# Allegro board Lock_NTHU-TEST_BOARD_V1-0911_view_locked.brd
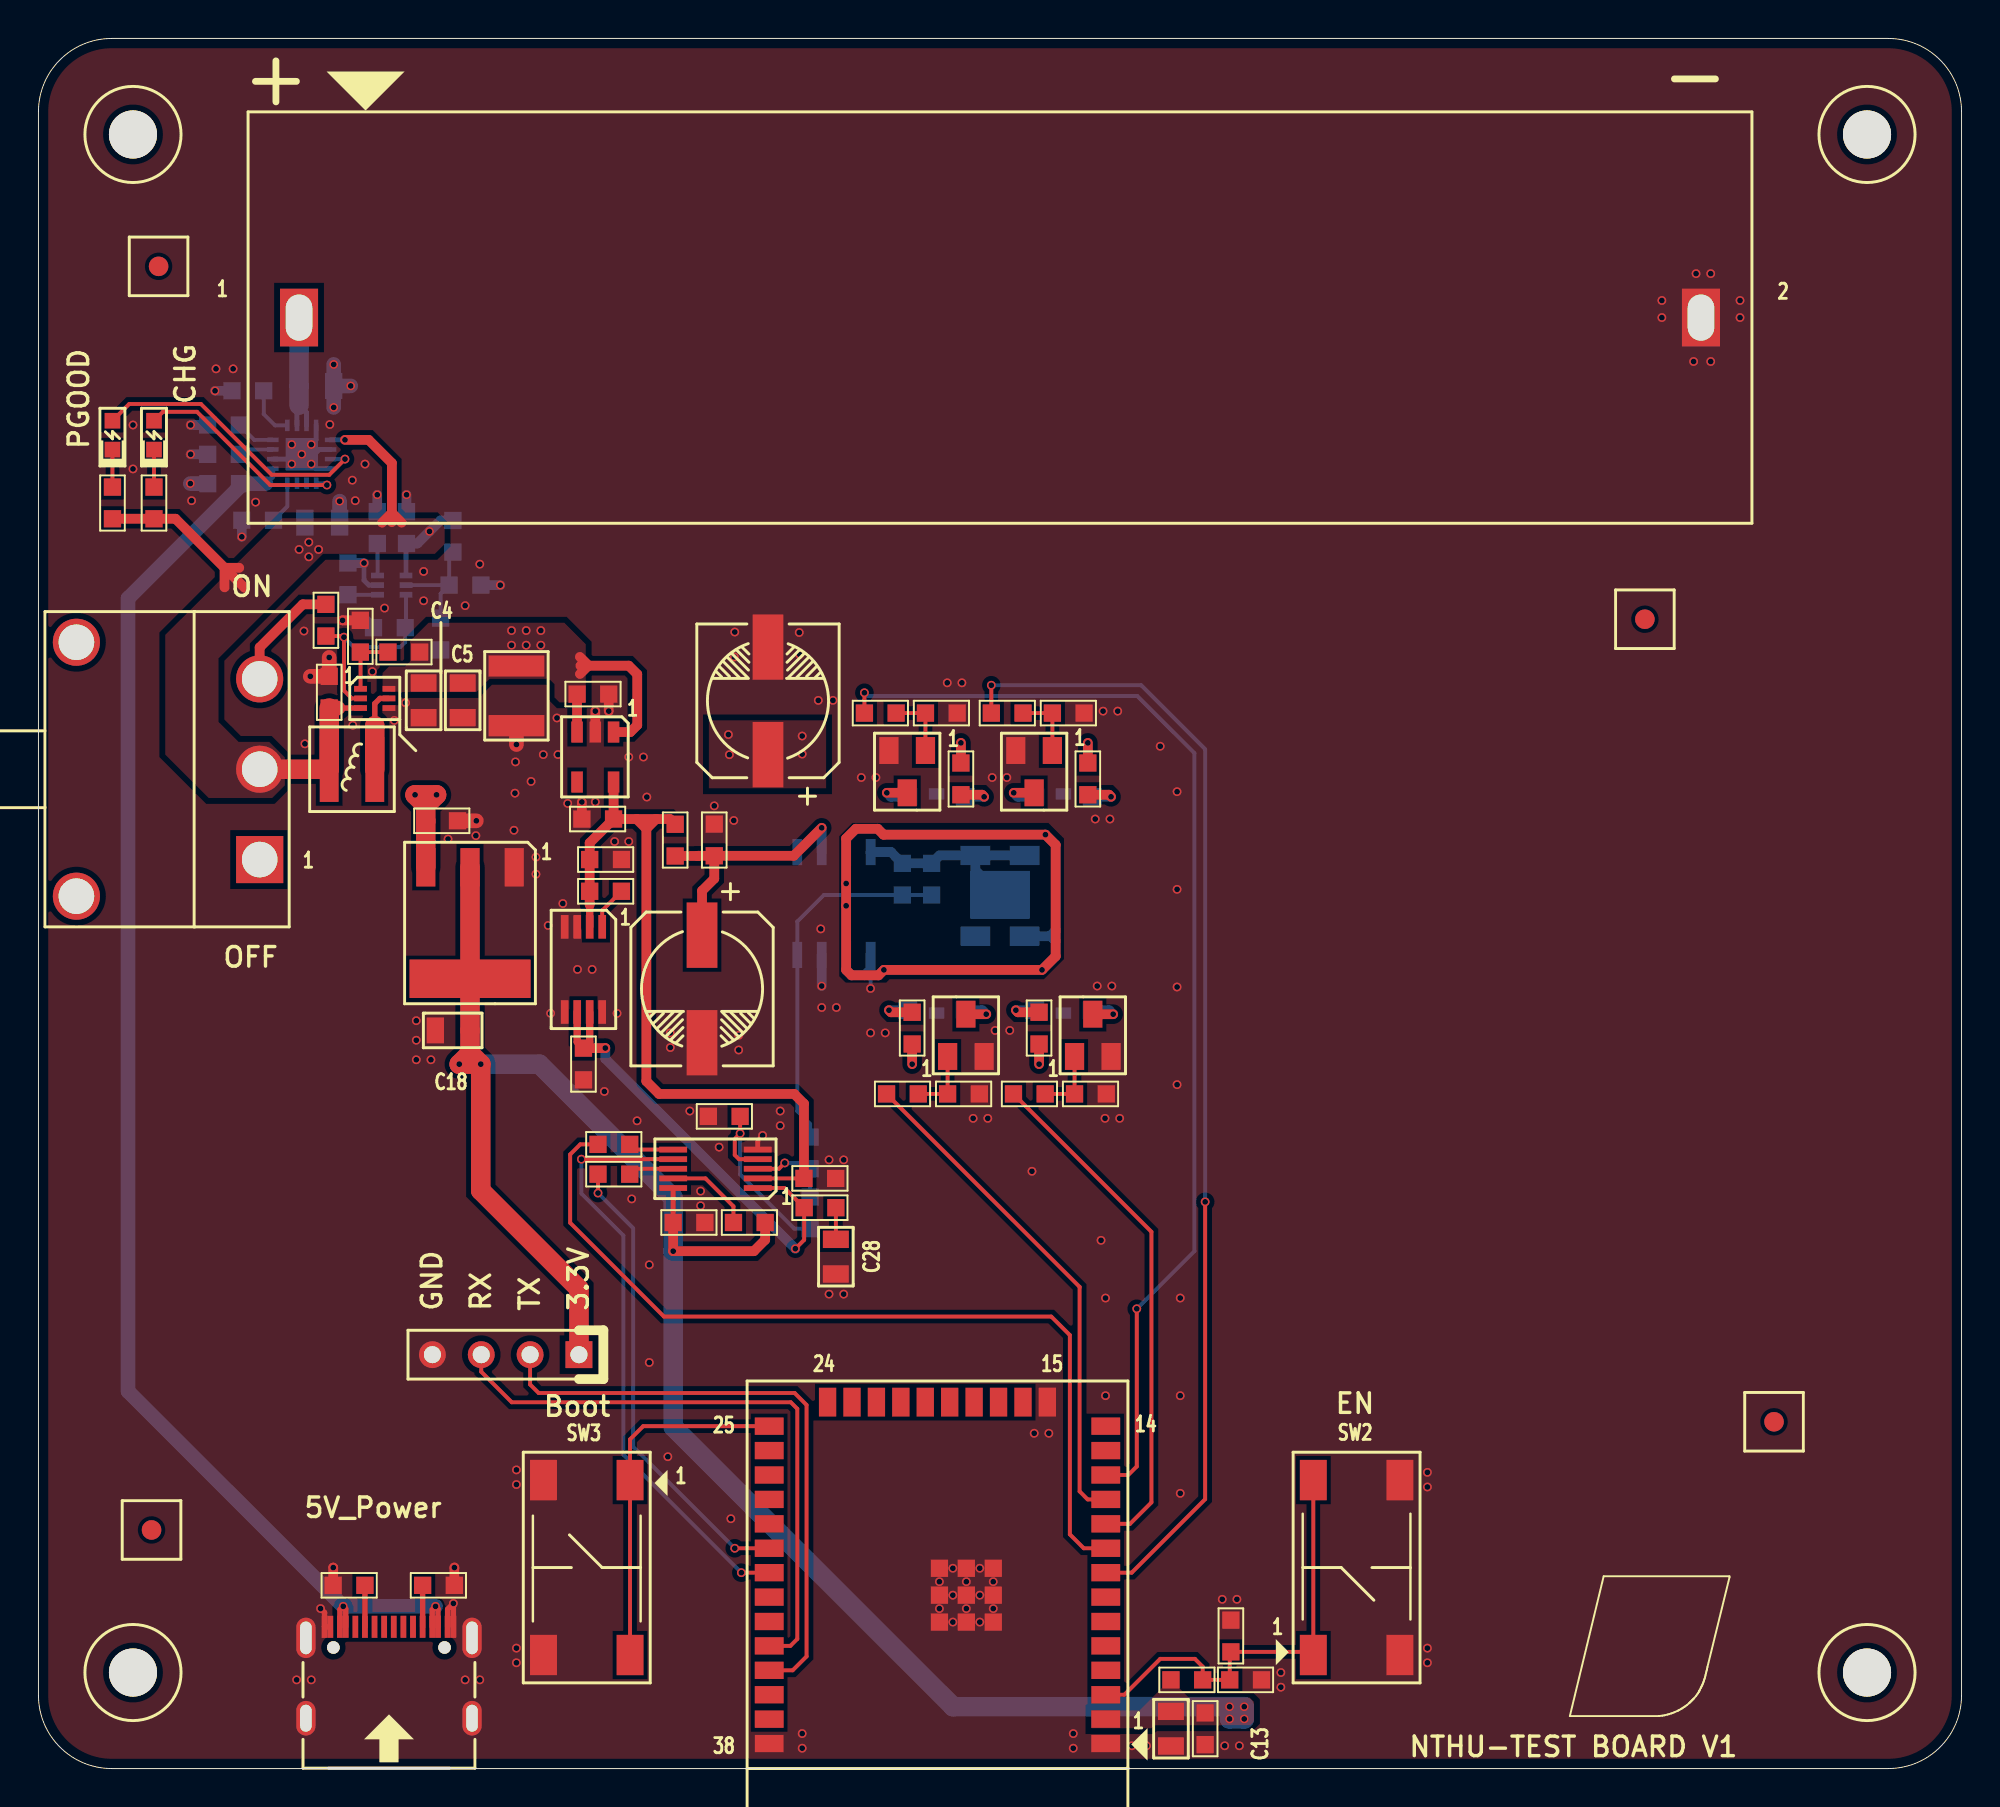
[diagram p0: board, top side]
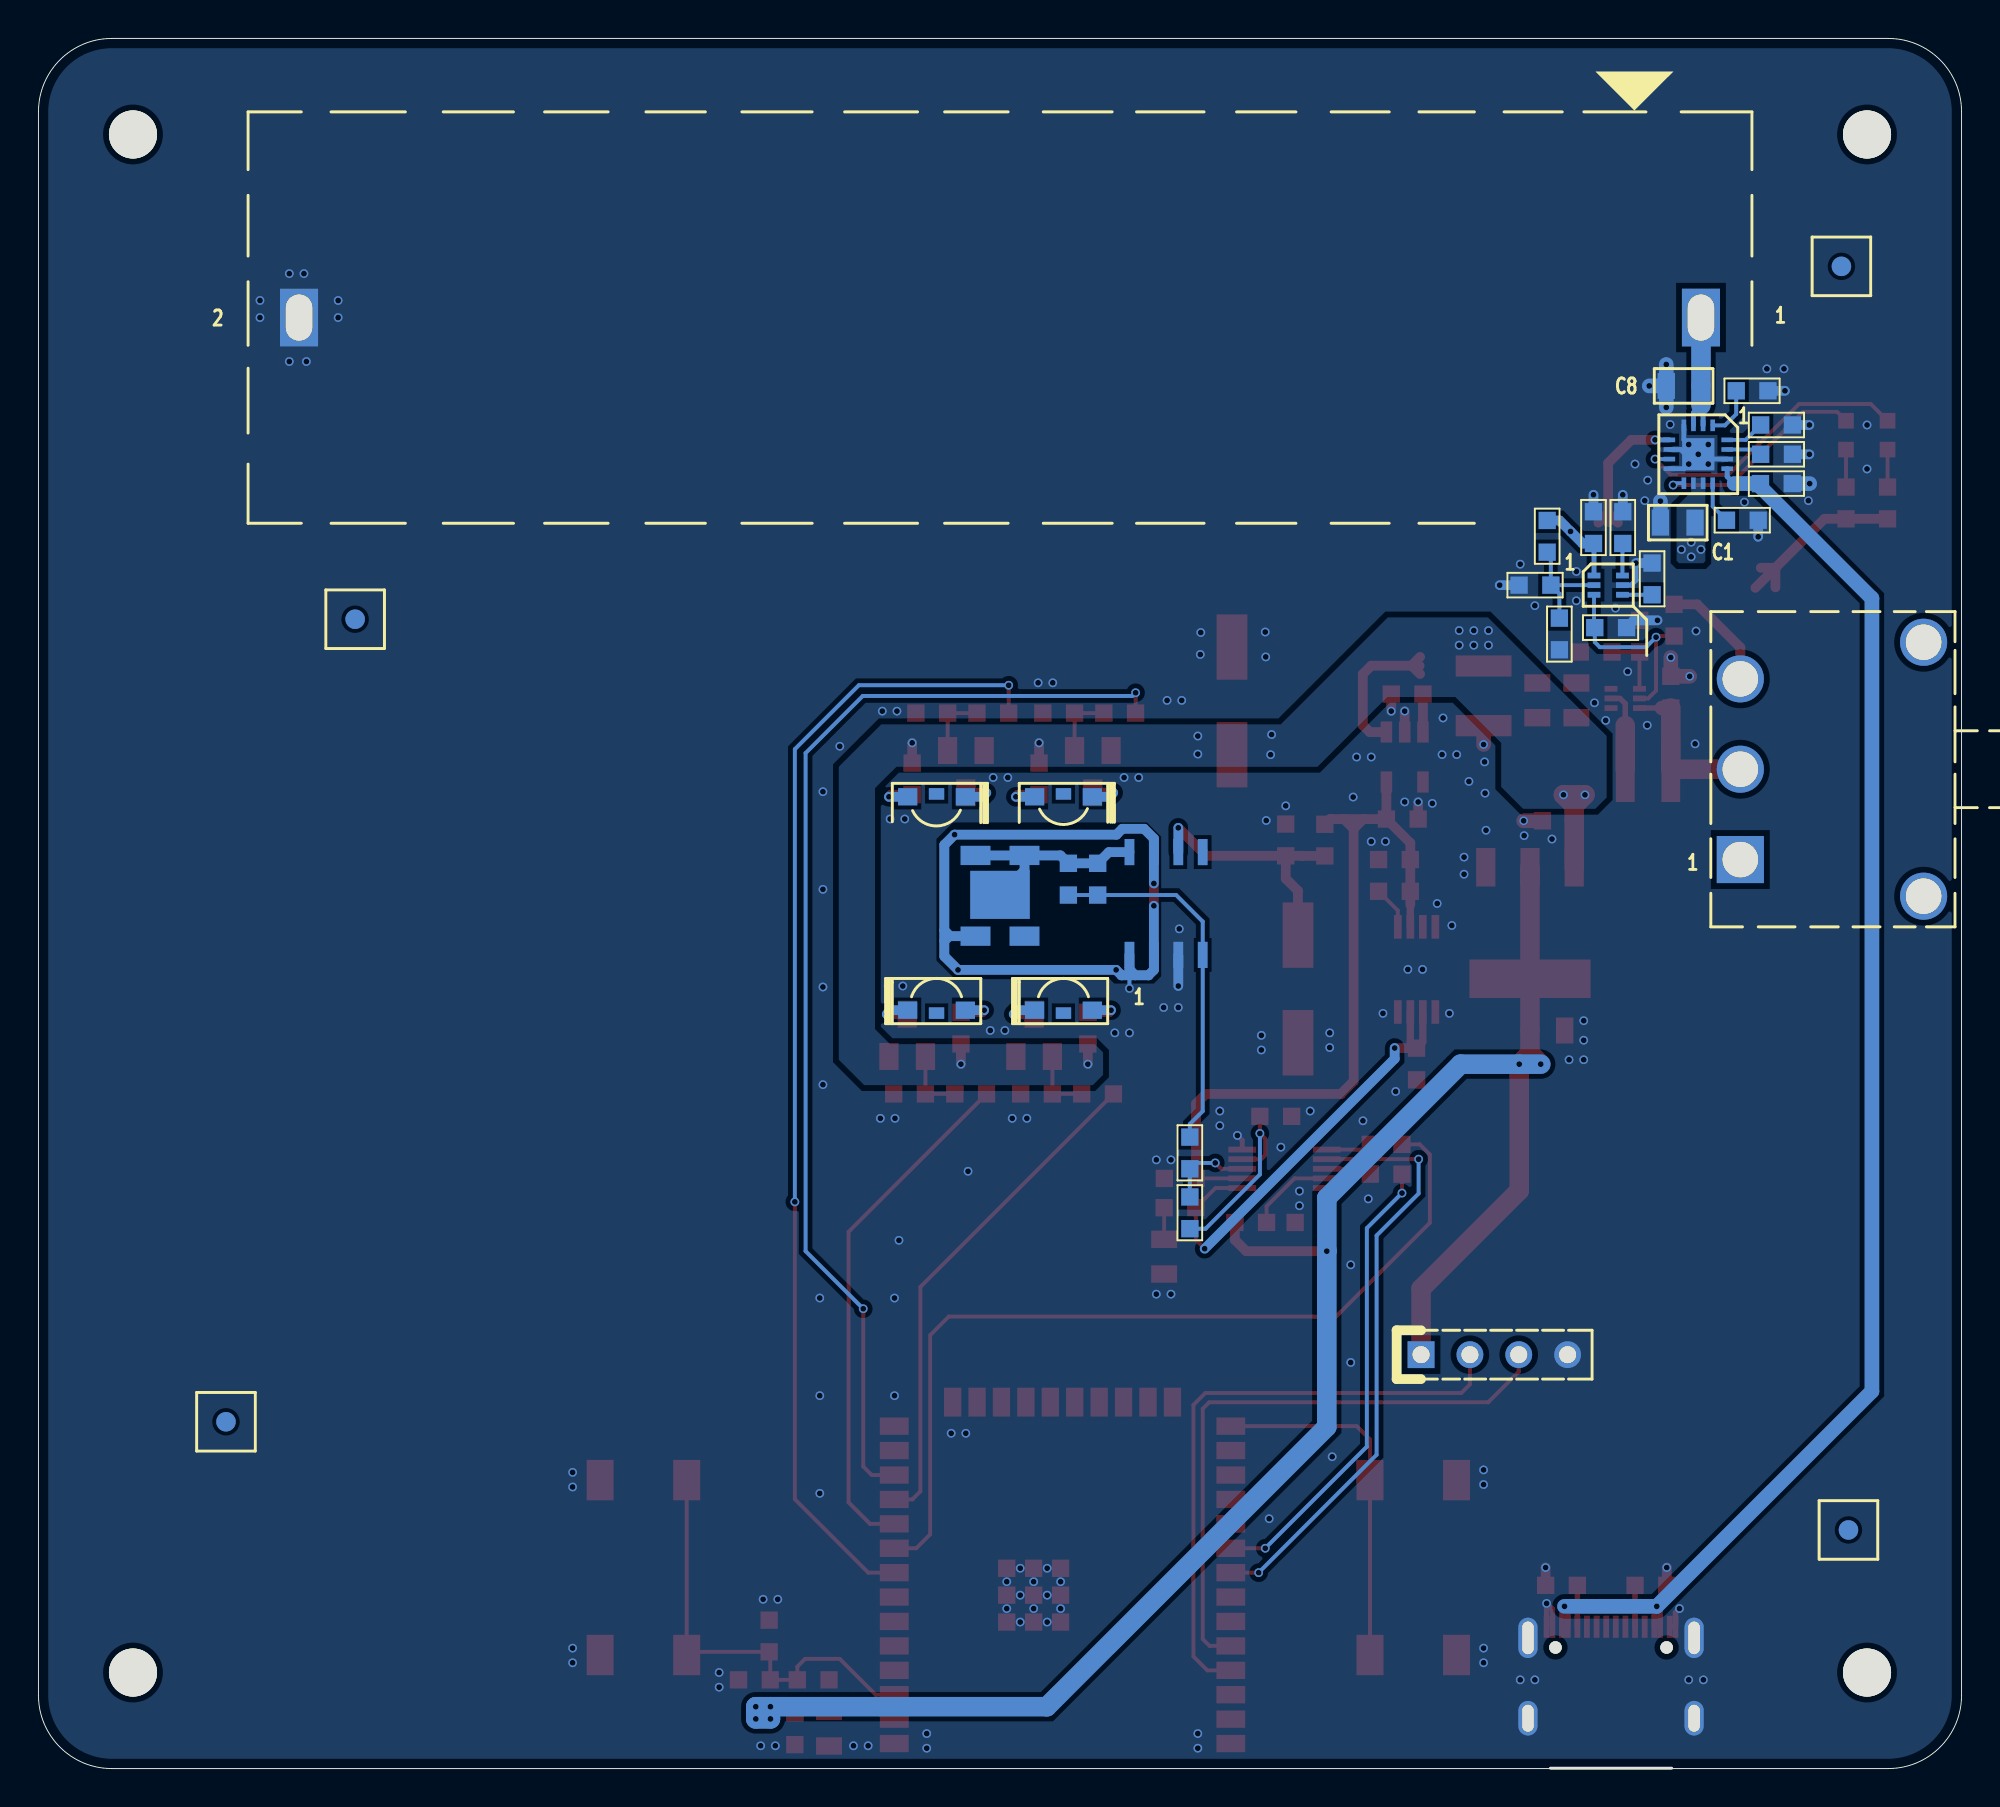
[diagram p1: board, bottom side, seen from below]

Outline 100 x 90 mm; copper layers: TOP, BOTTOM. Coordinates in mm from the lower left corner of the outline.
Outline path: 0,86.19 0,3.81 arc(1.12,1.12) 3.81,0 96.19,0 arc(98.88,1.12) 100,3.81 100,86.19 arc(98.88,88.88) 96.19,90 3.81,90 arc(1.12,88.88) 0,86.19

## Placement (name value [footprint] x y rotation side)
C1  4.7uF/25V/X7R,0805  [C0805]  14.76 64.81 180 bottom
C2  10uF/10V/X7R,0603  [C0603]  15.12 55.99 270 top
C3  47uF/10V/X7R,1210  [C1210]  24.85 55.8 270 top
C4  22uF/10V/X7R,0805  [C0805]  20.03 55.57 270 top
C5  22uF/10V/X7R,0805  [C0805]  22.06 55.57 270 top
C6  1uF/50V/X7R,0603  [C0603]  9.63 66.84 180 bottom
C7  0.1uF/50V/X7R,0603  [C0603]  19.14 64.55 90 bottom
C8  4.7uF/25V/X7R,0805  [C0805]  14.45 71.92 0 bottom
C9  1nF/50V/X7R,0603  [C0603]  20.91 59.02 270 bottom
C10  0.1uF/50V/X7R,0603  [C0603]  17.61 64.55 90 bottom
C11  10nF/50V/X7R,0603  [C0603]  16.09 61.89 90 bottom
C12  47uF/16V,EXV476M016A9GAA  [CASE_6P3X7P7]  37.93 55.54 180 top
C13  22uF/10V/X7R,0805  [C0805]  58.89 2.07 90 top
C14  0.1uF/50V/X7R,0603  [C0603]  60.67 2.07 90 top
C15  0.1uF/50V/X7R,0603  [C0603]  62.01 6.89 90 top
C16  10uF/10V/X7R,0603  [C0603]  62.77 4.61 180 top
C17  10uF/10V/X7R,0603  [C0603]  20.97 49.3 0 top
C18  22uF/10V/X7R,0805  [C0805]  21.54 38.4 180 top
C19  1uF/50V/X7R,0603  [C0603]  28.83 55.89 0 top
C20  1uF/50V/X7R,0603  [C0603]  29.08 49.39 180 top
C21  2.2pF/50V/NP0,0603  [C0603]  46.44 46.26 90 bottom
C22  0.1uF/50V/X7R,0603  [C0603]  29.49 47.29 0 top
C23  10uF/10V/X7R,0603  [C0603]  28.34 36.65 270 top
C24  1000pF/50V/NP0,0603  [C0603]  40.13 28.91 90 bottom
C25  0.1uF/50V/X7R,0603  [C0603]  35.14 48.31 270 top
C26  100uF/16V,UUL1C101MCL1GS  [CASE_6P3X7P7]  34.51 40.55 0 top
C27  1uF/50V/X7R,0603  [C0603]  33.83 28.41 180 top
C28  10uF/25V/X7R,0805  [C0805]  41.47 26.63 90 top
C29  1uF/50V/X7R,0603  [C0603]  40.63 30.7 0 top
D1  155124BS73200  [LED-21_1204-RA]  53.3 39.45 180 bottom
D2  155124BS73200  [LED-21_1204-RA]  46.7 39.45 180 bottom
D3  155124BS73200  [LED-21_1204-RA]  46.7 50.55 0 bottom
D4  155124BS73200  [LED-21_1204-RA]  53.3 50.55 0 bottom
D5  VEMD5060X01  [SENSOR-VEMD5060X01_4X5_4P_EP]  50 45.4 180 bottom
DPS1  Green LED  [LED_0603]  3.85 69.36 90 top
DPS2  Red LED  [LED_0603]  6.01 69.36 90 top
FD1  -  [FD_040]  6.25 78.14 0 top
FD2  -  [FD_040]  5.88 12.41 0 top
FD3  -  [FD_040]  90.25 18.04 0 top
FD4  -  [FD_040]  83.53 59.79 0 top
FD5  -  [FD_040]  6.25 78.14 180 bottom
FD6  -  [FD_040]  5.88 12.41 180 bottom
FD7  -  [FD_040]  90.25 18.04 180 bottom
FD8  -  [FD_040]  83.53 59.79 180 bottom
H1  CON  [PAD-D2P5MM]  4.91 85 0 top
H2  CON  [PAD-D2P5MM]  4.91 4.99 0 top
H3  CON  [PAD-D2P5MM]  95.08 4.99 0 top
H4  CON  [PAD-D2P5MM]  95.08 85 0 top
J1  Battery_Case  [BATTERY-CASE_77P7X20P9_2P_PIN3]  50 75.48 180 top
J2  USB TYPE C FEMALE  [USB_S041_B0A20]  18.23 0.02 0 top
J3  CON4  [CON-4P]  28.11 21.53 180 top
L1  XEL4030-102MEC  [L_4X4]  16.3 51.98 0 top
NOREF  -  []  0 86.19 0 top
NOREF#2  -  []  96.19 0 90 top
Q1  AO3400A  [SOT23_3P12X1P5_3P]  54.83 38.14 0 top
Q2  AO3400A  [SOT23_3P12X1P5_3P]  48.23 38.14 0 top
Q3  AO3400A  [SOT23_3P12X1P5_3P]  45.17 51.86 180 top
Q4  AO3400A  [SOT23_3P12X1P5_3P]  51.77 51.86 180 top
R1  4.12k,0603  [R0603]  9.62 68.37 0 bottom
R2  1.18k,0603  [R0603]  11.4 64.94 0 bottom
R3  1.13k,0603  [R0603]  9.62 69.89 0 bottom
R4  100k,0603  [R0603]  14.95 59.74 270 top
R5  1.5k,0603  [R0603]  3.85 65.84 270 top
R6  732k,0603  [R0603]  19 58.08 0 top
R7  1.5k,0603  [R0603]  6.01 65.84 270 top
R8  100k,0603  [R0603]  16.74 58.9 270 top
R9  10k,0603  [R0603]  10.89 71.67 0 bottom
R10  374k,0603  [R0603]  21.55 64.1 90 bottom
R11  470k,0603  [R0603]  18.24 59.35 0 bottom
R12  100k,0603  [R0603]  22.18 61.56 180 bottom
R13  5.1k,0603  [R0603]  16.15 9.53 0 top
R14  5.1k,0603  [R0603]  20.8 9.53 180 top
R15  10k,0603  [R0603]  59.71 4.61 0 top
R16  100R,0603  [R0603]  52.03 38.52 90 top
R17  220R,0603  [R0603]  51.53 35.09 0 top
R20  100k,0603  [R0603]  54.7 35.09 0 top
R21  100R,0603  [R0603]  45.43 38.52 90 top
R22  220R,0603  [R0603]  44.93 35.09 0 top
R23  100k,0603  [R0603]  48.1 35.09 0 top
R24  100R,0603  [R0603]  47.97 51.48 270 top
R25  220R,0603  [R0603]  43.77 54.91 0 top
R26  100k,0603  [R0603]  46.95 54.91 0 top
R27  100M,0603  [R0603]  44.92 46.26 90 bottom
R28  10k,0603  [R0603]  29.49 45.63 0 top
R29  100R,0603  [R0603]  40.13 32.02 90 bottom
R30  100R,0603  [R0603]  54.57 51.48 270 top
R31  100R,0603  [R0603]  33.11 48.3 90 top
R32  220R,0603  [R0603]  50.37 54.91 0 top
R33  100k,0603  [R0603]  53.55 54.91 0 top
R34  0.1R,0603  [R0603]  40.64 29.18 180 top
R35  10k,0603  [R0603]  36.96 28.41 0 top
R36  100R,0603  [R0603]  35.66 33.93 0 top
R37  47R,0603  [R0603]  29.92 30.92 180 top
R38  47R,0603  [R0603]  29.92 32.47 180 top
SW1  Slide_Switch  [SW_500-M6-SPDT_3P_4P7_PIN2P8]  6.74 51.98 270 top
SW2  Tactile_Switch  [SW_FSM4JSMAATR_4P]  68.54 10.46 180 top
SW3  Tactile_Switch  [SW_FSM4JSMAATR_4P]  28.51 10.46 0 top
U1  TPS61023  [IC_SOT23_1P3X1P7_6P_0P5MM]  17.49 55.67 0 top
U2  BQ24074  [IC_VQFN_3X3_16P_0P5MM_EP]  13.69 68.37 270 bottom
U3  TPS3842A010DRLR  [IC_SOT23_1P3X1P7_6P_0P5MM]  18.37 61.56 180 bottom
U4  ESP32-WROOM-32E  [MODULE_ESP32-WROOM-32E_38P_EP]  46.75 6.56 180 top
U5  EC50117KBG  [SOT223-4P-2P3MM-7X6P5MM]  22.44 43.98 180 top
U6  LP5907MFX-3.3/NOPB  [IC_SOT23_3P05X1P75_5P_0P95MM]  28.96 52.62 270 top
U7  LTC6655BHMS8-2.5#PBF  [IC_MSOP_3X3_8P_0P65MM]  28.34 41.57 180 top
U8  LMP7721  [IC_SOIC_3P99X5P05_8P_1P27MM]  41.36 45 90 bottom
U9  ADS8866IDGS  [IC_VSSOP_3X3_10P_0P5MM]  35.2 31.2 180 top

## Library data of the parts
C1-C11 C13-C25 C27-C29 = C0.01uF
C12 C26 = 100uF-16V-T-D
D1-D4 DPS1 DPS2 = LED_0
D5 = VEMD5060X01
FD1-FD8 = FD_040
H1-H4 = PH 2_9.54mm 1x3 180degree DIP
J1 = CON2
J2 = H20PIN_59
J3 = CON4
L1 = INDUCTOR
Q1-Q4 = RTR025N03HZGTL_N-type
R1-R17 R20-R38 = R10
SW1 = Slide_Switch
SW2 SW3 = Tactile_Switch
U1 = TPS61023
U2 = BQ24074
U3 = TPS3842A010DRLR
U4 = ESP32-WROOM-32E
U5 = H20PIN_9
U6 = LP5907MFX-3.3/NOPB
U7 = LTC6655BHMS8-2.5#PBF
U8 = LMP7721
U9 = ADS8866IDGS

## Footprints (pads in the part's own frame, mm; a bottom-side part is the same pattern mirrored in y, then rotated)
BATTERY-CASE_77P7X20P9_2P_PIN3
  rect 1.98x3 hole 1.38x2.4: 1(36.45,0) 2(-36.45,0)
C0603
  rect 0.9x0.9 smd: 1(-0.825,0) 2(0.825,0)
C0805
  rect 0.904x1.35 smd: 1(-0.902,0) 2(0.902,0)
C1210
  rect 1.104x2.9 smd: 1(-1.552,0) 2(1.552,0)
CASE_6P3X7P7
  rect 1.6x3.4 smd: 1(0,2.8) 2(0,-2.8)
CON-4P
  rect 1.397x1.397 hole 0.889: 1(0,0)
  round 1.397 hole 0.889: 2(2.54,0) 3(5.08,0) 4(7.62,0)
FD_040
  round 1.016 smd: 1(0,0)
IC_MSOP_3X3_8P_0P65MM
  rect 0.4x1.229 smd: 1(-0.975,-2.214) 2(-0.325,-2.214) 3(0.325,-2.214) 4(0.975,-2.214) 5(0.975,2.214) 6(0.325,2.214) 7(-0.325,2.214) 8(-0.975,2.214)
IC_SOIC_3P99X5P05_8P_1P27MM
  rect 1.359x0.51 smd: 1(-2.674,1.905) 2(-2.674,0.635) 3(-2.674,-0.635) 4(-2.674,-1.905) 5(2.674,-1.905) 6(2.674,-0.635) 7(2.674,0.635) 8(2.674,1.905)
IC_SOT23_1P3X1P7_6P_0P5MM
  rect 0.67x0.3 smd: 1(-0.74,0.5) 2(-0.74,0) 3(-0.74,-0.5) 4(0.74,-0.5) 5(0.74,0) 6(0.74,0.5)
IC_SOT23_3P05X1P75_5P_0P95MM
  rect 1.1x0.6 smd: 1(-1.3,0.95) 2(-1.3,0) 3(-1.3,-0.95) 4(1.3,-0.95) 5(1.3,0.95)
IC_VQFN_3X3_16P_0P5MM_EP
  rect 0.6x0.24 smd: 1(-1.504,0.75) 2(-1.504,0.25) 3(-1.504,-0.25) 4(-1.504,-0.75) 9(1.504,-0.75) 10(1.504,-0.25) 11(1.504,0.25) 12(1.504,0.75)
  rect 0.24x0.6 smd: 5(-0.75,-1.504) 6(-0.25,-1.504) 7(0.25,-1.504) 8(0.75,-1.504) 13(0.75,1.504) 14(0.25,1.504) 15(-0.25,1.504) 16(-0.75,1.504)
  rect 1.68x1.68 smd: EP(0,0)
IC_VSSOP_3X3_10P_0P5MM
  rect 1.45x0.3 smd: 1(-2.2,1) 2(-2.2,0.5) 3(-2.2,0) 4(-2.2,-0.5) 5(-2.2,-1) 6(2.2,-1) 7(2.2,-0.5) 8(2.2,0) 9(2.2,0.5) 10(2.2,1)
L_4X4
  rect 0.98x3.4 smd: 1(-1.185,0) 2(1.185,0)
LED-21_1204-RA
  rect 0.8x0.6 smd: (0,-0.15)
  rect 1x0.9 smd: 1(-1.5,0) 2(1.5,0)
LED_0603
  rect 0.813x0.813 smd: 1(0.75,0) 2(-0.75,0)
MODULE_ESP32-WROOM-32E_38P_EP
  rect 1.5x0.9 smd: 1(-8.75,5.26) 2(-8.75,3.99) 3(-8.75,2.72) 4(-8.75,1.45) 5(-8.75,0.18) 6(-8.75,-1.09) 7(-8.75,-2.36) 8(-8.75,-3.63) 9(-8.75,-4.9) 10(-8.75,-6.17) 11(-8.75,-7.44) 12(-8.75,-8.71) 13(-8.75,-9.98) 14(-8.75,-11.25) 25(8.75,-11.25) 26(8.75,-9.98) 27(8.75,-8.71) 28(8.75,-7.44) 29(8.75,-6.17) 30(8.75,-4.9) 31(8.75,-3.63) 32(8.75,-2.36) 33(8.75,-1.09) 34(8.75,0.18) 35(8.75,1.45) 36(8.75,2.72) 37(8.75,3.99) 38(8.75,5.26)
  rect 0.9x1.5 smd: 15(-5.715,-12.5) 16(-4.445,-12.5) 17(-3.175,-12.5) 18(-1.905,-12.5) 19(-0.635,-12.5) 20(0.635,-12.5) 21(1.905,-12.5) 22(3.175,-12.5) 23(4.445,-12.5) 24(5.715,-12.5)
  rect 0.9x0.9 smd: EP1(-2.9,-1.06) EP2(-2.9,-2.46) EP3(-2.9,-3.86) EP4(-1.5,-1.06) EP5(-1.5,-2.46) EP6(-1.5,-3.86) EP7(-0.1,-1.06) EP8(-0.1,-2.46) EP9(-0.1,-3.86)
PAD-D2P5MM
  round 2.5 hole 2.5 unplated: (0,0)
R0603
  rect 0.9x0.9 smd: 1(-0.825,0) 2(0.825,0)
SENSOR-VEMD5060X01_4X5_4P_EP
  rect 1.55x1 smd: 1(1.275,2.1) 2(-1.275,2.1) 3(-1.275,-2.1) 4(1.275,-2.1)
  rect 3.1x2.5 smd: EP(0,0.05)
SOT23_3P12X1P5_3P
  rect 1x1.4 smd: 1(-0.95,-1.1) 2(0.95,-1.1) 3(0,1.1)
SOT223-4P-2P3MM-7X6P5MM
  rect 1x2 smd: 1(-2.3,-2.9) 2(0,-2.9) 3(2.3,-2.9)
  rect 6.3x2 smd: 4(0,2.9)
SW_500-M6-SPDT_3P_4P7_PIN2P8
  round 2.45 hole 1.85: (-6.605,-4.765) (6.605,-4.765) 2(0,4.765) 3(-4.7,4.765)
  rect 2.45x2.45 hole 1.85: 1(4.7,4.765)
SW_FSM4JSMAATR_4P
  rect 1.4x2.1 smd: 1(2.25,4.55) 2(2.25,-4.55) 3(-2.25,4.55) 4(-2.25,-4.55)
USB_S041_B0A20
  round 0.65 hole 0.65 unplated: (-2.89,6.28) (2.89,6.28)
  rect 0.3x1.15 smd: A1(-3.35,7.355) A4(-2.55,7.355) A5(-1.25,7.355) A6(-0.25,7.355) A7(0.25,7.355) A8(1.25,7.355) A9(2.55,7.355) A12(3.35,7.355) B1(3.05,7.355) B4(2.25,7.355) B5(1.75,7.355) B6(0.75,7.355) B7(-0.75,7.355) B8(-1.75,7.355) B9(-2.25,7.355) B12(-3.05,7.355)
  oval 1x2.1 hole 0.6x1.7: C1(-4.32,6.78) C2(4.32,6.78)
  oval 1x1.8 hole 0.6x1.4: C3(4.32,2.6) C4(-4.32,2.6)

## Nets
3V3_ANA: C20.1 C22.1 C29.1 R28.1 R31.2 U6.5(OUT) U7.2(VIN) U9.2(AVDD)
3V3_DIG: C13.2 C14.2 C18.1 C27.2 J3.1 R15.1 R35.2 U4.2(3V3) U5.2(OUTPUT_1) U5.4(OUTPUT_2) U9.10(DVDD)
5V: C3.1 C4.1 C5.1 C12.1 C17.1 C19.1 R6.2 R16.1 R21.1 R24.1 R30.1 U1.6(VOUT) U5.3(INPUT) U6.1(IN) U6.3(EN)
5V_USB: C6.1 J2.A4(VBUS1) J2.A9(VBUS4) J2.B4(VBUS3) J2.B9(VBUS2) U2.13(IN)
GND: C1.1 C2.1 C3.2 C4.2 C5.2 C6.2 C7.2 C8.2 C9.2 C10.2 C11.2 C12.2 C13.1 C14.1 C15.2 C16.1 C17.2 C18.2 C19.2 C20.2 C22.2 C23.2 C25.1 C26.2 C27.1 C28.1 C29.2 D5.3(ANODE) J1.2 J2.A1(GND1) J2.A12(GND4) J2.B1(GND3) J2.B12(GND2) J2.C1(GND5) J2.C2(GND6) J2.C3(GND7) J2.C4(GND8) J3.4 Q1.2(S) Q2.2(S) Q3.2(S) Q4.2(S) R1.1 R2.1 R3.1 R8.1 R9.1 R11.1 R12.1 R13.1 R14.1 R20.2 R23.2 R26.2 R33.2 R36.1 SW2.3(B_1) SW2.4(B_2) SW3.3(B_1) SW3.4(B_2) U1.4(GND) U2.4(C\E\) U2.6(EN1) U2.8(VSS) U2.14(TMR) U2.EP U3.5(GND) U4.1(GND[1]) U4.15(GND[2]) U4.38(GND[3]) U4.EP1 U4.EP2 U4.EP3 U4.EP4 U4.EP5 U4.EP6 U4.EP7 U4.EP8 U4.EP9 U5.1(ADJ/GND) U6.2(GND) U7.3(GND_1) U7.4(GND_2) U7.5(GND_3) U7.8(GND_4) U8.1(IN+) U8.2(NC_1) U8.3(V-) U8.7(NC_3) U9.5(GND)
ADC_AINN: C24.1 R36.2 U9.4(AINN)
ADC_AINP: C24.2 R29.1 U9.3(AINP)
ADC_CONVST: R38.2 U4.9(IO33)
ADC_DOUT: U4.31(IO19) U9.7(DOUT)
ADC_SCLK: R37.2 U4.30(IO18)
ESP_EN: C15.1 C16.2 R15.2 SW2.1(A_1) SW2.2(A_2) U4.3(EN)
ESP_IO0: SW3.1(A_1) SW3.2(A_2) U4.25(IO0)
LED1_GATE: R17.1 U4.10(IO25)
LED2_GATE: R22.1 U4.11(IO26)
LED3_GATE: R25.1 U4.12(IO27)
LED4_GATE: R32.1 U4.8(IO32)
PD_SUM: C21.2 D5.1(CATHODE_1) D5.2(CATHODE_2) D5.EP R27.2 U8.8(IN-)
VREF_2V5: C23.1 R34.2 U7.6(VOUT_S) U7.7(VOUT_F) U9.1(REF)
N149079: C1.2 C2.2 C7.1 L1.1 R5.2 R7.2 R10.2 SW1.2(COMM) U1.3(VIN) U2.5(EN2) U2.10(OUT_1) U2.11(OUT_2) U3.1(VDD)
N149165: DPS1.1(CATHODE) U2.7(P\G\O\O\D\)
N149169: DPS2.1(CATHODE) U2.9(C\H\G\)
N149175: DPS1.2(ANODE) R5.1
N438766: DPS2.2(ANODE) R7.1
N2937937: C8.1 J1.1 U2.2(BAT_1) U2.3(BAT_2)
N2939517: C9.1 R10.1 R12.2 U3.2(SENSE)
N2940151: J2.A5(CC1) R13.2
N2940189: J2.B5(CC2) R14.2
N2942040: R3.2 U2.16(ISET)
N2942044: R2.2 U2.12(ILIM)
N2942048: R1.2 U2.15(ITERM)
N2942580: R9.2 U2.1(TS)
N2943997: R4.1 SW1.3(B)
N2944001: R4.2 R11.2 U1.2(EN) U3.3(R\E\S\E\T\)
N2944526: C11.1 U3.4(CTS)
N2944533: C10.1 U3.6(CTR)
N5094984: L1.2 U1.5(SW)
N5095522: R6.1 R8.2 U1.1(FB)
N5097864: D1.2(ANODE) R16.2
N5097868: D1.1(CATHODE) Q1.3(D)
N5097918: Q1.1(G) R17.2 R20.1
N5098229: D2.2(ANODE) R21.2
N5098233: D2.1(CATHODE) Q2.3(D)
N5098295: Q2.1(G) R22.2 R23.1
N5098941: D3.2(ANODE) R24.2
N5098945: D3.1(CATHODE) Q3.3(D)
N5099007: Q3.1(G) R25.2 R26.1
N5099099: D4.2(ANODE) R30.2
N5099103: D4.1(CATHODE) Q4.3(D)
N5099165: Q4.1(G) R32.2 R33.1
N5100922: R28.2 U7.1(S\H\D\N\)
N5106576: J3.2 U4.35(TXD0)
N5106619: J3.3 U4.34(RXD0)
N5113279: R35.1 U9.9(DIN)
N5114022: C21.1 R27.1 R29.2 U8.4(VOUT)
N5117523: C25.2 C26.1 R31.1 U8.6(V+)
N5126182: C28.2 R34.1
N5174510: R37.1 U9.8(SCLK)
N5174536: R38.1 U9.6(CONVST)

Pads without a net: D5 4; FD1 1; FD2 1; FD3 1; FD4 1; FD5 1; FD6 1; FD7 1; FD8 1; J2 A6 A7 A8 B6 B7 B8; SW1 1; U4 4 5 6 7 13 14 16 17 18 19 20 21 22 23 24 26 27 28 29 32 33 36 37; U6 4; U8 5

## Via types
v1: diameter 0.457, hole 0.305, TOP to BOTTOM, 252 vias

## Routing (per net, layer and track width the routed paths; a pad name or vN(x,y) marks a point on that pad's centre or on a via; arc(x,y) is an arc through that point)
3V3_ANA: length 40.9
  TOP w0.203: U9.2 C29.1
  TOP w0.381: U7.2 28.66,44.93
  TOP w0.508: C29.1 39.81,34.59 39.3,35.09 32.27,35.09 31.61,35.75 31.61,48.89 ; 31.61,48.89 32.12,49.39 ; 31.61,48.89 31.1,49.39 ; R31.2 32.84,49.39 32.12,49.39 ; 28.66,44.93 R28.1 C22.1 28.66,48.15 C20.1 ; C20.1 31.1,49.39 ; C20.1 U6.5 ; 31.1,49.39 32.12,49.39
3V3_DIG: length 102.5
  TOP w0.254: U9.10 C27.2
  TOP w0.508: R35.2 37.79,27.51 37.2,26.92 v1(33.01,26.92) 33,26.92 C27.2
  TOP w1.016: v1(23,36.64) 23,30.06 28.11,24.96 J3.1 ; v1(23,36.64) v1(21.88,36.64) 22.44,37.2 ; v1(23,36.64) 22.44,37.2 ; U5.2 U5.4 C18.1 22.44,37.2
  BOTTOM w1.016: v1(61.94,3.22) v1(61.94,2.58) v1(62.7,2.58) v1(62.7,3.22) v1(61.94,3.22) ; v1(61.94,3.22) 47.56,3.22 33.01,17.77 v1(33.01,26.92) 33,26.92 33,29.69 26.05,36.64 v1(23,36.64) v1(21.88,36.64)
5V: length 20.5
  TOP w0.508: R21.1 v1(45.43,36.64) ; 28.18,57.37 28.59,57.37 ; 28.59,57.37 28.61,57.37 ; 28.59,57.37 28.16,56.94 ; R30.1 v1(54.57,53.36) ; 28.61,57.37 28.16,57.83 ; 28.61,57.37 30.7,57.37 31.14,56.93 31.14,54.28 30.78,53.92 U6.1 ; C19.1 U6.3 ; R16.1 v1(52.03,36.64) ; R24.1 v1(47.97,53.36)
  TOP w1.016: U5.3 C17.1 20.14,50.09 ; 20.14,50.09 v1(19.58,50.65) v1(20.7,50.65) 20.14,50.09
  vias: v1(24.6,59.2) v1(24.6,58.44) v1(25.36,59.2) v1(25.36,58.44) v1(26.12,59.2) v1(26.12,58.44) v1(35.88,53.79) v1(35.93,52.74) v1(39.71,53.71) v1(39.71,52.77)
5V_USB: length 77
  TOP w0.279: J2.A4 15.68,8.27 v1(15.85,8.44) 15.98,8.31 J2.B9 ; J2.A9 20.78,8.31 v1(20.65,8.44) 20.48,8.27 J2.B4
  BOTTOM w0.254: 11.82,66.84 12.19,67.21 U2.13
  BOTTOM w0.762: v1(20.65,8.44) v1(15.85,8.44) 4.66,19.63 4.66,60.87 10.46,66.67 C6.1 11.82,66.84
GND: length 110.7
  TOP w0.254: U9.5 37.4,32.68 v1(37.66,32.93)
  TOP w0.279: J2.A12 v1(21.58,8.59) 21.28,8.29 J2.B1 ; J2.B12 J2.A1 14.88,8.11 v1(14.67,8.32)
  TOP w0.508: R8.1 15.81,59.73 v1(15.81,59.73) ; C19.2 v1(29.66,55.01) ; v1(21.63,10.46) 21.63,10.45 R14.1 ; R13.1 15.33,10.45 v1(15.33,10.46) ; U6.2 v1(28.96,55.01) ; C20.2 v1(28.26,50.28) ; 43.94,48.58 43.64,48.89 42.51,48.89 42,48.38 v1(42,46.04) v1(42,44.88) 42,41.55 42.28,41.26 43.68,41.26 v1(43.96,41.55) v1(52.18,41.55) 52.9,42.26 52.9,48.05 v1(52.36,48.58) 43.94,48.58
  TOP w0.762: C17.2 v1(22.77,49.3) ; C3.2 v1(24.85,53.27) ; v1(14.14,56.82) C2.1 v1(15.12,57.8)
  BOTTOM w0.203: 43.27,41.57 v1(43.27,40.58)
  BOTTOM w0.254: U2.14 12.91,68.12 v1(13.17,67.86) ; U2.6 14.61,68.62 14.36,68.37 v1(13.69,68.37) ; v1(16.93,62.71) 16.93,61.81 17.18,61.56 U3.5 ; U2.4 14.44,69.13 v1(14.19,68.88) ; U2.8 14.43,67.62 v1(14.19,67.86)
  BOTTOM w0.508: C7.2 v1(19.14,66.26) ; R12.1 v1(24.02,61.56) ; 40.73,42.33 v1(40.73,40.71) ; R3.1 v1(7.91,69.89) ; 52.9,43.04 52.9,43.6 ; 52.9,43.04 52.9,42.26 v1(52.18,41.55) v1(43.96,41.55) 43.68,41.26 43.68,41.27 42.96,41.27 ; 52.9,43.04 52.64,43.3 52.59,43.3 ; 52.9,43.6 52.9,48.05 v1(52.36,48.58) 43.94,48.58 43.64,48.89 42.51,48.89 42,48.38 U8.7 v1(42,46.04) ; 52.9,43.6 52.59,43.3 ; 43.27,42.33 43.27,41.57 42.96,41.27 ; 42.96,41.27 42.28,41.27 42,41.55 U8.2 v1(42,44.88) ; R9.1 v1(9.18,71.67) ; D5.3 52.59,43.3 ; C11.2 v1(16.93,62.71) ; v1(15.81,59.73) 17.04,59.73 R11.1 ; R1.1 v1(7.91,68.37) ; C10.2 v1(17.61,66.26) ; R2.1 v1(10.57,64.08)
  BOTTOM w0.762: C1.1 v1(15.66,65.93) ; C8.2 v1(15.35,70.81) ; C8.2 v1(15.35,73.04) ; C8.2 v1(16.24,71.92) ; C6.2 v1(7.9,66.84)
  vias: v1(4.91,69.89) v1(4.91,67.61) v1(7.96,65.95) v1(9.23,72.81) v1(10.12,72.81) v1(11.29,65.88) v1(13.17,68.88) v1(13.42,4.61) v1(13.8,59.17) v1(13.86,53.31) v1(14.19,4.61) v1(15.15,69.92) v1(16.32,67.02) v1(16.34,54.27) v1(16.47,65.95) v1(16.98,67.86) v1(17.36,57.06) v1(18,60.37) v1(18.5,54.52) v1(19.09,55.44) v1(19.65,38.9) v1(19.65,37.89) v1(19.65,36.87) v1(20.03,62.27) v1(20.03,60.75) v1(20.41,36.87) v1(21.3,48.35) v1(22.19,60.49) v1(22.19,4.61) v1(22.75,48.53) v1(22.95,62.65) v1(22.95,4.61) v1(24.73,48.81) v1(24.8,52.37) v1(24.78,50.74) v1(24.85,15.54) v1(24.85,14.77) v1(24.85,6.26) v1(24.85,5.5) v1(25.62,51.35) v1(25.87,47.41) v1(25.87,46.52) v1(26.25,52.75) v1(26.5,43.86) v1(26.63,39.28) v1(26.96,54.65) v1(27.01,52.75) v1(27.27,45) v1(27.52,50.21) v1(28.03,41.57) v1(28.79,41.57) v1(28.96,50.28) v1(29.43,35.22) v1(29.96,48.23) v1(30.09,39.28) v1(30.7,52.62) v1(30.7,48.23) v1(30.85,29.63) v1(31.13,33.7) v1(31.46,52.62) v1(31.64,50.54) v1(31.76,26.2) v1(31.76,21.12) v1(32.73,16.22) v1(32.85,38.27) v1(32.85,37.51) v1(33.87,34.2) v1(34.43,30.04) v1(34.43,29.28) v1(35.14,50.08) v1(35.39,32.33) v1(36,13) v1(36.21,59.12) v1(36.18,57.83) v1(36.16,49.32) v1(36.41,38.14) v1(36.41,37.38) v1(38.57,34.2) v1(38.57,33.44) v1(39.56,59.1) v1(39.59,57.95) v1(39.71,1.82) v1(39.71,1.06) v1(40.55,55.57) v1(40.68,43.68) v1(40.73,39.59) v1(41.11,31.66) v1(41.11,24.68) v1(41.31,55.57) v1(41.49,39.59) v1(41.87,31.66) v1(41.87,24.68) v1(42.79,51.55) v1(43.27,38.27) v1(43.55,51.55) v1(44.03,38.27) v1(46.85,9.72) v1(46.85,8.32) v1(47.26,56.48) v1(47.55,10.42) v1(47.55,9.02) v1(47.55,7.62) v1(48.02,56.48) v1(48.25,9.72) v1(48.25,8.32) v1(48.6,33.82) v1(48.95,10.42) v1(48.95,9.02) v1(48.95,7.62) v1(49.36,33.82) v1(49.59,51.55) v1(49.65,9.72) v1(49.65,8.32) v1(49.75,38.4) v1(50.36,51.55) v1(50.51,38.4) v1(51.66,31.07) v1(51.78,17.44) v1(52.54,17.44) v1(53.81,1.82) v1(53.81,1.06) v1(54.95,49.39) v1(55.05,40.71) v1(55.25,27.48) v1(55.36,55.01) v1(55.46,33.82) v1(55.49,24.48) v1(55.49,19.4) v1(55.71,49.39) v1(55.82,40.71) v1(56.12,55.01) v1(56.22,33.82) v1(56.86,1.18) v1(57.62,1.18) v1(58.33,53.18) v1(59.21,50.82) v1(59.21,45.74) v1(59.21,40.66) v1(59.21,35.58) v1(59.37,24.48) v1(59.37,19.4) v1(59.37,14.32) v1(61.56,8.8) v1(61.68,1.18) v1(62.32,8.8) v1(62.45,1.18) v1(64.6,4.99) v1(64.6,4.23) v1(72.22,15.41) v1(72.22,14.65) v1(72.22,6.26) v1(72.22,5.5) v1(84.42,76.37) v1(84.42,75.48) v1(86.07,73.19) v1(86.19,77.77) v1(86.96,77.77) v1(86.96,73.19) v1(88.48,76.37) v1(88.48,75.48)
ADC_AINN: length 10.4
  TOP w0.203: U9.4 36.43,31.7 36.21,31.92 36.21,32.76 v1(36.49,33.04) R36.2
  BOTTOM w0.203: C24.1 39.31,28.08 36.49,30.9 v1(36.49,33.04)
ADC_AINP: length 4.4
  TOP w0.203: U9.3 38.5,31.2 v1(38.81,31.5)
  BOTTOM w0.203: v1(38.81,31.5) 39.82,31.5 R29.1 C24.2
ADC_CONVST: length 46.2
  TOP w0.203: U4.9 54.36,11.46 53.63,12.18 53.63,22.55 52.67,23.51 32.52,23.51 27.65,28.39 27.65,31.94 28.17,32.47 R38.2
ADC_DOUT: length 31.2
  TOP w0.203: U9.7 v1(28.23,31.7) ; U4.31 v1(36.55,10.19)
  BOTTOM w0.203: v1(28.23,31.7) 28.23,29.91 30.42,27.73 30.42,16.32 v1(36.55,10.19)
ADC_SCLK: length 24.2
  TOP w0.203: R37.2 v1(29.1,29.94) ; U4.30 v1(36.21,11.46)
  BOTTOM w0.203: v1(36.21,11.46) 30.92,16.74 30.92,28.11 v1(29.1,29.94)
ESP_EN: length 23
  TOP w0.203: SW2.2 SW2.1 66.13,6.07 C15.1 61.95,6.01 C16.2 R15.2 60.54,5.3 60.13,5.71 58.33,5.71 56.46,3.84 U4.3
ESP_IO0: length 18.7
  TOP w0.203: SW3.2 SW3.1 30.76,17.13 31.45,17.81 U4.25
LED1_GATE: length 27.1
  TOP w0.203: U4.10 56.76,12.73 57.87,13.84 57.87,27.92 R17.1
LED2_GATE: length 26.4
  TOP w0.203: U4.11 54.56,14 54.14,14.42 54.14,25.05 R22.1
LED3_GATE: length 59.7
  TOP w0.203: R25.1 v1(42.95,55.96) ; v1(57.11,23.92) 57.11,15.71 56.67,15.27 U4.12
  BOTTOM w0.203: v1(42.95,55.96) 43.12,55.79 57.14,55.79 60.11,52.82 60.11,26.92 v1(57.11,23.92)
LED4_GATE: length 59.7
  TOP w0.203: U4.8 56.85,10.19 60.67,14.01 v1(60.67,29.48) ; R32.1 v1(49.55,56.35)
  BOTTOM w0.203: v1(60.67,29.48) 60.67,53.03 57.34,56.35 v1(49.55,56.35)
PD_SUM: length 11
  BOTTOM w0.508: 43.27,47.67 44.34,47.67 R27.2 C21.2 46.85,47.5 D5.1 ; D5.2 D5.1 ; D5.1 48.72,46.72 D5.EP
VREF_2V5: length 24.9
  TOP w0.203: U9.1 38.79,30.2 R34.2 39.82,27.5 v1(39.36,27.04)
  TOP w0.381: U7.6 28.01,37.8 C23.1 28.66,37.8 U7.7
  TOP w0.508: C23.1 29.47,37.48 v1(29.48,37.48)
  BOTTOM w0.508: v1(39.36,27.04) 29.48,36.92 v1(29.48,37.48)
N149079: length 31.3
  TOP w0.279: U1.3 15.57,55.17
  TOP w0.508: 10.72,61.42 9.68,62.46 ; 9.68,62.46 10.44,62.46 ; 9.68,62.46 9.68,61.45 ; 9.68,62.46 7.13,65.01 R7.2 R5.2 ; 18.38,64.84 18.38,65.32 ; 18.38,65.32 18.38,67.91 17.17,69.12 v1(15.94,69.12) ; 18.38,65.32 18.88,64.81 ; 18.38,65.32 17.87,64.81
  TOP w0.762: 15.57,55.17 C2.2
  TOP w1.016: SW1.2 L1.1 C2.2
  BOTTOM w0.254: U3.1 19.11,63.7 C7.1 ; U2.5 v1(15.94,69.12)
  BOTTOM w0.508: R10.2 20.9,64.93 v1(20.33,64.35) 19.71,63.73 C7.1
  vias: v1(13.55,63.41) v1(14.06,63.8) v1(14.06,63.03) v1(14.57,63.41)
N149165: length 15.1
  TOP w0.203: DPS1.1 4.72,70.98 8.45,70.98 12.13,67.3 15.12,67.3 v1(15.94,68.12)
  BOTTOM w0.203: U2.7 v1(15.94,68.12)
N149169: length 11.4
  TOP w0.203: v1(15,66.77) 12.05,66.77 8.24,70.58 6.47,70.58 DPS2.1
  BOTTOM w0.203: U2.9 14.9,66.86 v1(15,66.77)
N149175: length 1.9
  TOP w0.203: DPS1.2 R5.1
N438766: length 1.9
  TOP w0.203: DPS2.2 R7.1
N2937937: length 6.9
  BOTTOM w0.254: U2.3 13.94,70.54 13.55,70.93 13.44,70.82 U2.2
  BOTTOM w1.016: 13.55,70.93 C8.1 J1.1
N2939517: length 5.9
  BOTTOM w0.203: U3.2 R12.2 ; R12.2 21.36,63.09 R10.1 ; R12.2 20.91,61.12 C9.1
N2940151: length 2.2
  TOP w0.279: J2.A5 R13.2
N2940189: length 2.2
  TOP w0.279: J2.B5 R14.2
N2942040: length 2.1
  BOTTOM w0.203: R3.2 11.22,69.12 U2.16
N2942044: length 2.2
  BOTTOM w0.203: R2.2 12.94,65.65 U2.12
N2942048: length 1.8
  BOTTOM w0.203: R1.2 10.7,68.62 U2.15
N2942580: length 2.7
  BOTTOM w0.203: R9.2 11.72,70.46 12.3,69.87 U2.1
N2943997: length 6
  TOP w0.508: R4.1 13.75,60.56 11.5,58.32 SW1.3
N2944001: length 10.8
  TOP w0.203: R4.2 15.83,58.91 v1(15.89,58.86) 15.89,56.08 16.29,55.67 U1.2
  BOTTOM w0.203: v1(15.89,58.86) 16.41,58.33 18.81,58.33 19.07,58.6 R11.2 19.11,59.39 U3.3
N2944526: length 1.5
  BOTTOM w0.203: U3.4 16.09,61.06 C11.1
N2944533: length 1.7
  BOTTOM w0.203: C10.1 17.63,63.71 U3.6
N5094984: length 4.3
  TOP w0.279: 17.49,54.25 17.49,55.4 17.76,55.67 U1.5
  TOP w1.016: L1.2 17.49,54.25
N5095522: length 3.4
  TOP w0.203: U1.1 16.75,58.07 R8.2 R6.1
N5097864: length 2.2
  TOP w0.508: R16.2 50.93,39.34 v1(50.83,39.45)
  BOTTOM w0.508: D1.2 v1(50.83,39.45)
N5097868: length 2.2
  TOP w0.508: Q1.3 v1(55.88,39.24)
  BOTTOM w0.508: v1(55.88,39.24) 55.68,39.45 D1.1
N5097918: length 3.5
  TOP w0.203: R17.2 R20.1 Q1.1
N5098229: length 2.2
  TOP w0.508: v1(44.23,39.45) 44.33,39.34 R21.2
  BOTTOM w0.508: D2.2 v1(44.23,39.45)
N5098233: length 2.2
  TOP w0.508: Q2.3 v1(49.28,39.24)
  BOTTOM w0.508: D2.1 49.08,39.45 v1(49.28,39.24)
N5098295: length 3.5
  TOP w0.203: R22.2 R23.1 Q2.1
N5098941: length 2.2
  TOP w0.508: R24.2 49.07,50.66 v1(49.17,50.55)
  BOTTOM w0.508: D3.2 v1(49.17,50.55)
N5098945: length 2.2
  TOP w0.508: Q3.3 v1(44.11,50.76)
  BOTTOM w0.508: D3.1 44.32,50.55 v1(44.11,50.76)
N5099007: length 3.5
  TOP w0.203: Q3.1 R26.1 R25.2
N5099099: length 2.2
  TOP w0.508: R30.2 55.67,50.66 v1(55.77,50.55)
  BOTTOM w0.508: D4.2 v1(55.77,50.55)
N5099103: length 2.2
  TOP w0.508: Q4.3 v1(50.71,50.76)
  BOTTOM w0.508: D4.1 50.92,50.55 v1(50.71,50.76)
N5099165: length 3.5
  TOP w0.203: Q4.1 R33.1 R32.2
N5100922: length 2.3
  TOP w0.203: R28.2 29.31,44.63 U7.1
N5106576: length 31.7
  TOP w0.203: J3.2 25.57,19.98 26.01,19.54 39.32,19.54 39.94,18.91 39.94,5.83 39.22,5.11 U4.35
N5106619: length 31.7
  TOP w0.203: U4.34 39.1,6.38 39.46,6.74 39.46,18.71 39.12,19.05 24.61,19.05 23.03,20.64 J3.3
N5113279: length 4.6
  TOP w0.203: R35.1 36.14,29.24 34.68,30.7 U9.9
N5114022: length 19
  BOTTOM w0.203: C21.1 R27.1 40.84,45.44 39.46,44.06 U8.4 39.46,34.2 40.13,33.53 R29.2
N5117523: length 13.9
  TOP w0.508: v1(40.73,48.94) 39.27,47.48 C25.2 ; C25.2 35.14,46.3 34.51,45.66 C26.1 ; C25.2 34.31,47.48 34.3,47.47 R31.1
  BOTTOM w0.508: 40.73,47.67 v1(40.73,48.94)
N5126182: length 1.6
  TOP w0.203: R34.1 C28.2
N5174510: length 2.4
  TOP w0.203: U9.8 31.03,31.2 R37.1
N5174536: length 2.4
  TOP w0.203: U9.6 30.99,32.2 30.75,32.44 R38.1

## Copper pours and planes (outline as drawn; the poured copper is in the pictures)
3V3_DIG on TOP: 54.75,3.01 57.24,3.01 58.43,4.21 58.43,5.07 59.35,5.07 59.35,4.16 59.8,3.7 62.98,3.7 63.21,3.47 63.21,2.45 63,2.25 58.03,2.25 57.87,2.1 54.75,2.1
5V on TOP: 17.89,56 22.77,56 23.46,56.68 26.56,56.68 26.84,56.4 26.84,55.72 27.09,55.46 28.46,55.46 28.46,58.49 27.34,59.6 20.28,59.6 19.32,58.64 19.32,57.58 19.06,57.33 18.22,57.33 17.89,57
5V on TOP: 34.86,54.52 34.86,50.99 40.96,50.99 40.96,54.52
5V on BOTTOM: 35.39,54.32 56.17,54.32 58.38,52.11 58.38,36.87 57.06,35.55 45.17,35.55 44.64,36.08 44.64,37.25 45.07,37.68 55.71,37.68 56.5,38.47 56.5,50.99 55.38,52.11 33.49,52.11 29.86,55.74 26.33,55.74 23.94,53.36 23.94,51.07 22.8,49.93 19.04,49.93 18.45,50.51 18.45,53.71 24.63,59.88 29.83,59.88
GND on TOP: 99.49,3.81 98.52,1.48 96.19,0.51 3.81,0.51 1.48,1.48 0.51,3.81 0.51,86.19 1.48,88.52 3.81,89.49 96.19,89.49 98.52,88.52 99.49,86.19 ; 4 cut-outs
GND on BOTTOM: 99.49,3.81 98.52,1.48 96.19,0.51 3.81,0.51 1.48,1.48 0.51,3.81 0.51,86.19 1.48,88.52 3.81,89.49 96.19,89.49 98.52,88.52 99.49,86.19 ; 1 cut-out
N149079 on TOP: 9.36,57.75 9.36,54.45 10.4,53.41 12,53.41 12.81,52.59 12.81,51.15 12.15,50.49 8.85,50.49 6.59,52.75 6.59,58.97 12.66,65.04 20.64,65.04 21.12,64.56 21.12,63.69 20.61,63.19 14.8,63.19
N149079 on BOTTOM: 13.32,67.15 14.06,67.15 14.06,66.41 14.82,65.65 14.82,62.83 14.69,62.7 13.42,62.7 13.32,62.81

## Text on the board
Ref Des/Silkscreen Top: OFF | ON | 5V_Power | Boot | EN | NTHU-TEST BOARD V1 | PGOOD | CHG | GND | RX | TX | 3.3V
